# Altium PCB snowflake_r2.PcbDoc (part 2 of 2)
Units mm, origin at the board's own origin, x right, y up, seen from the top; angles counter-clockwise.
Board outline 80 x 69.28 mm, 2 copper layers (Component Side, Bottom Layer), stack 1.554 mm thick; 100 components, 57 nets, 399 pads, 234 vias.
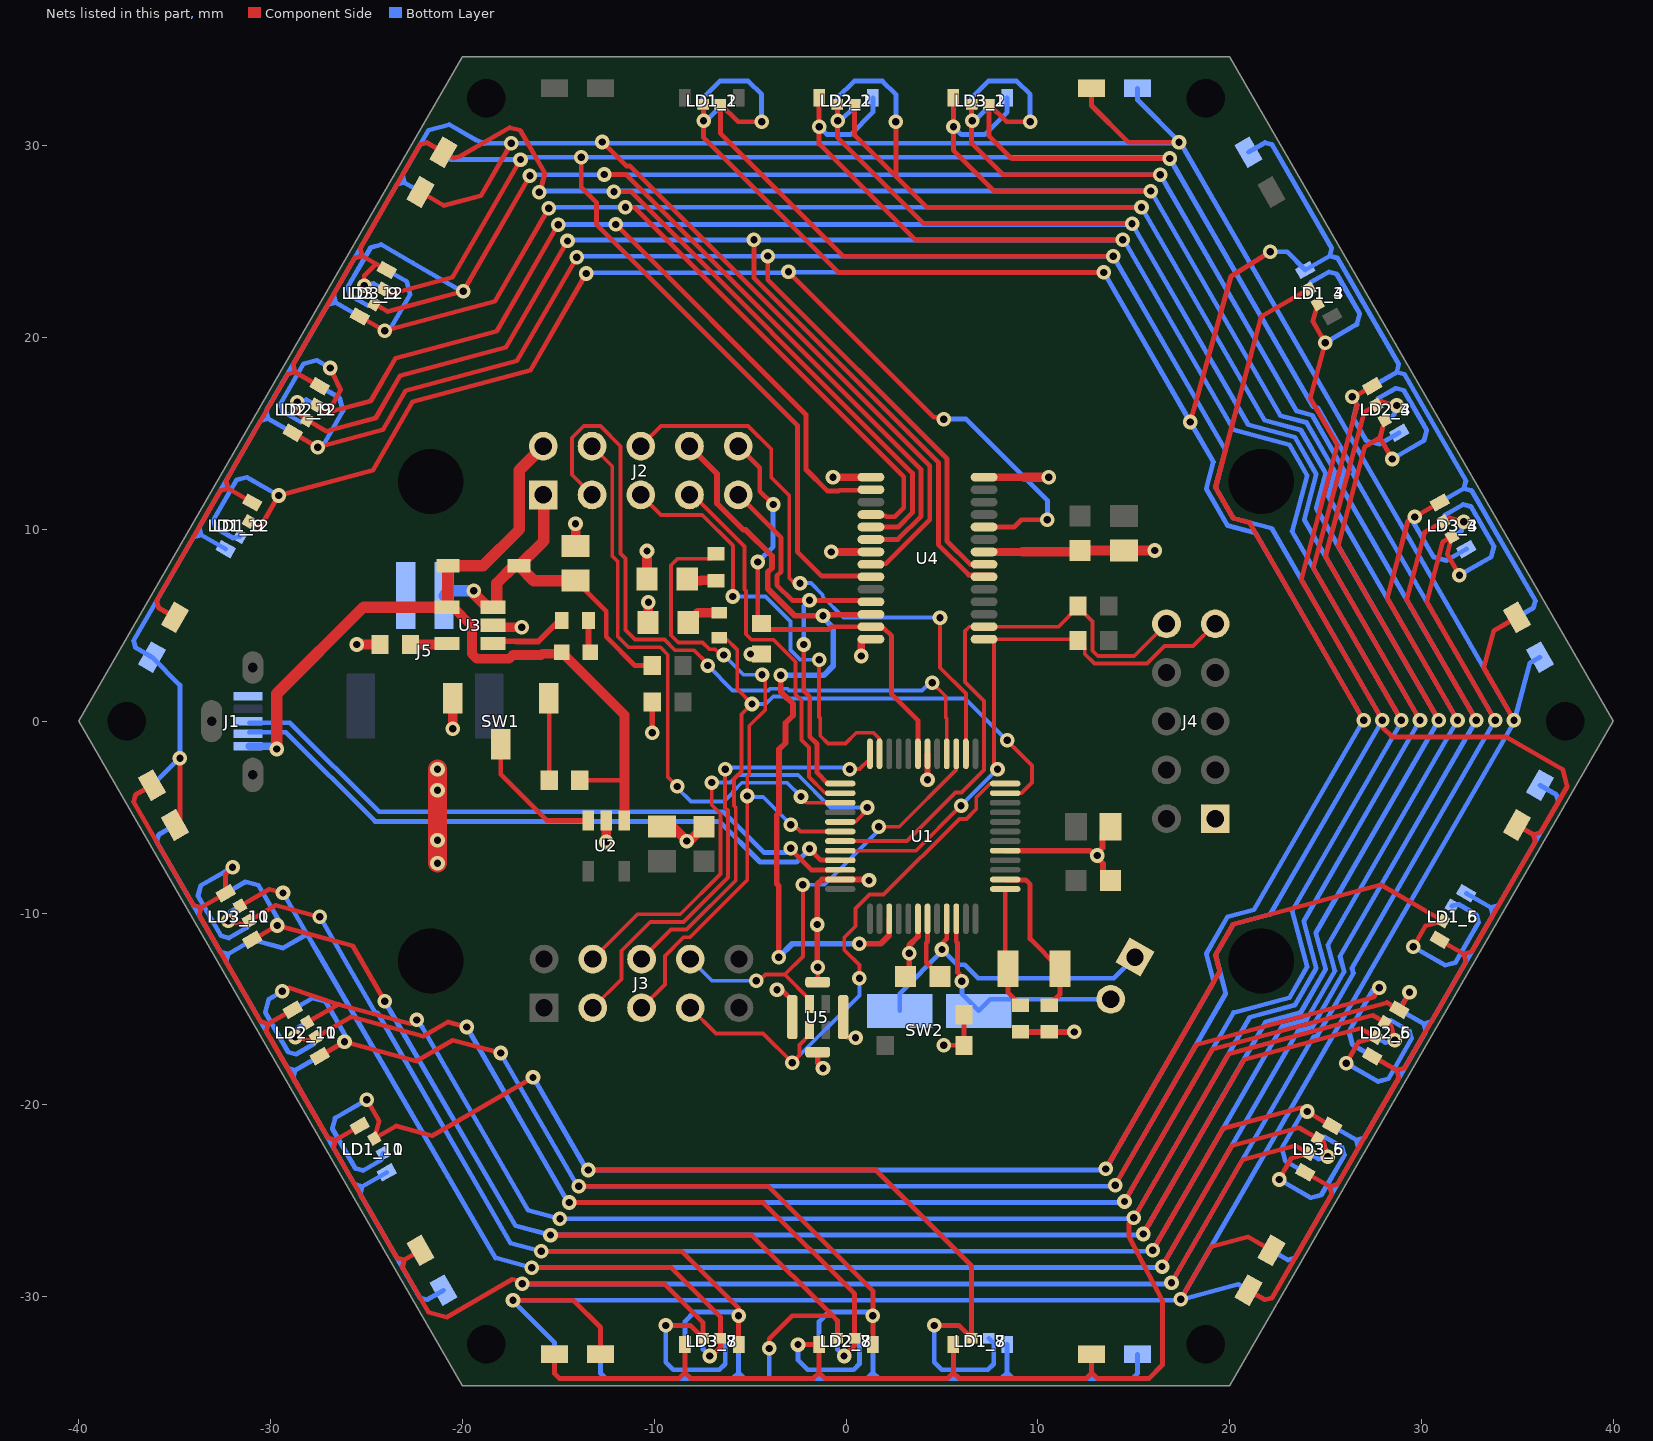
[diagram p2: the nets of this part, all layers, seen from the top]

## Via types
v1: diameter 0.762, hole 0.381, Component Side to Bottom Layer, tented both sides, 234 vias

## Nets (pads, with @x,y where several pads share a name; then routed paths per layer and width w, separated by ;. In a path a pad name is that pad's centre, name@x,y a point inside that pad or via, vN(x,y) a via of type N, cw(c..) or ccw(c..) an arc to the next point about the centre after c; other vN are vias at no path point) (continued)
CS3: LD1_1.3 LD1_2.3 LD1_3.3 LD1_4.1 LD1_5.2 LD1_6.2 LD1_7.2 LD1_8.2 LD1_9.2 LD1_10.2 LD1_11.2 LD1_12.2 LD2_4.1 LD3_4.1 LD4_4.2 LD5_4.2 U4.24 | length 358.3
  Component Side w0.25: LD1_9.2@-31.139,10.415 -30.715,10.17 -30.462,10.238 v1(-29.58,11.766) -24.661,13.084 -22.598,16.657 -16.448,18.305 v1(-13.54,23.342) ; v1(-24.98,-19.734) -24.342,-20.838 LD1_11.2@-24.589,-21.76 -23.456,-21.105 -21.578,-21.609 v1(-16.317,-18.571) ; v1(-13.445,-23.397) 1.544,-23.397 6.55,-28.403 LD1_7.2@6.55,-32.175 5.875,-31.5 v1(4.6,-31.5) ; v1@-7.475,31.175 v1@-7.425,31.225 ; LD1_1.3@-7.45,32.175 -7.425,32.175 v1@-7.425,31.274 ; v1@-7.425,31.275 v1(-7.425,31.302) ; v1(-3,23.425) 4.577,15.848 5.002,15.848 v1(5.1,15.75) ; U4.24@7.7,10.125 8.775,10.125 9.15,10.5 v1(10.5,10.5) ; v1(13.445,23.397) -0.397,23.397 -7.425,30.425 v1@-7.425,31.225 ; v1(13.54,-23.342) 19.491,-13.035 19.263,-12.186 20.185,-10.589 27.873,-8.529 LD1_5.2@31.139,-10.415 30.217,-10.662 v1(29.58,-11.766) ; v1(17.947,15.6) 20.075,23.2 v1(22.125,24.475) ; LD1_3.3@24.139,22.539 21.652,21.104 19.263,12.186 20.184,10.589 21.034,10.362 v1(26.985,0.054) ; v1@-7.425,31.225 v1@-7.425,31.274 ; v1@-7.425,31.225 -7.4,31.25 v1@-7.425,31.274
  Bottom Layer w0.25: LD1_12.2@-31.589,9.636 -31.931,9.544 -32.872,10.088 -32.982,10.497 -31.782,12.576 -31.236,12.722 v1(-29.58,11.766) ; v1(-24.98,-19.734) -26.636,-20.69 -26.782,-21.236 -25.582,-23.315 -25.172,-23.424 -24.231,-22.881 LD1_10.2@-24.139,-22.539 ; v1@-16.3,-18.562 v1@-13.54,-23.342 ; v1(-13.54,23.342) -13.498,23.384 -3.013,23.384 -2.986,23.411 13.431,23.411 v1(13.445,23.397) v1(17.947,15.6) 19.152,13.512 18.78,12.122 19.888,10.203 21.352,9.811 v1(26.985,0.054) 21.278,-9.83 19.888,-10.203 18.78,-12.122 19.172,-13.586 v1(13.54,-23.342) ; v1(-13.445,-23.397) v1@13.485,-23.397 ; v1(-7.425,31.302) -7.289,31.302 -6.575,32.015 -6.575,32.175 LD1_2.3@-6.55,32.175 ; v1(4.6,-31.5) 4.6,-33.412 5,-33.812 7.4,-33.812 7.7,-33.512 7.7,-32.425 LD1_8.2@7.45,-32.175 ; v1(5.1,15.75) 6.262,15.75 10.5,11.512 v1(10.5,10.5) ; LD4_4.2@20.979,29.664 21.845,30.164 22.203,30.068 25.322,24.665 25.212,24.256 ; v1(22.125,24.475) 22.995,24.475 LD1_4.1@23.946,23.525 25.212,24.256 ; LD2_4.1@27.446,17.462 28.712,18.193 ; v1(29.58,-11.766) 31.236,-12.722 31.782,-12.576 32.982,-10.497 32.872,-10.088 31.931,-9.544 LD1_6.2@31.589,-9.636 ; LD3_4.1@30.946,11.4 32.212,12.131 ; LD5_4.2@34.979,5.415 35.845,5.915 35.941,6.273 32.622,12.021 32.212,12.131 ; 25.212,24.256 25.622,24.146 28.822,18.603 28.712,18.193 ; 28.712,18.193 29.122,18.084 32.322,12.541 32.212,12.131
CS4: LD1_1.2 LD1_2.2 LD1_3.2 LD1_4.2 LD1_5.1 LD2_5.1 LD2_6.4 LD2_7.4 LD2_8.4 LD2_9.4 LD2_10.4 LD2_11.4 LD2_12.4 LD3_5.1 LD4_5.2 LD5_5.2 U4.21 | length 343.6
  Component Side w0.25: LD2_9.4@-28.846,15.038 v1(-27.547,14.288) -24.144,15.199 -22.972,17.229 -17.148,18.789 v1(-14.029,24.191) ; LD2_11.4@-27.446,-17.462 v1(-26.147,-16.712) -22.39,-17.719 -20.503,-16.629 v1(-18,-17.3) ; v1(-13.935,-24.245) -4.055,-24.245 1.4,-29.7 LD2_7.4@1.4,-32.5 ; v1(-4.4,31.25) -5.625,31.25 LD1_1.2@-6.55,32.175 -6.55,30.65 -0.145,24.245 v1(13.935,24.245) ; v1(-4.075,24.25) -4.075,23.021 5.266,13.681 5.266,9.384 6.475,8.175 U4.21@7.7,8.175 ; v1(14.029,-24.191) 18.256,-16.87 27.518,-14.388 v1(27.8,-13.9) ; LD5_5.2@20.979,-29.664 21.845,-30.164 22.203,-30.068 25.322,-24.665 25.212,-24.256 ; LD3_5.1@23.946,-23.525 25.212,-24.256 ; LD1_3.2@24.589,21.76 24.342,20.838 v1(24.98,19.734) 24.205,16.843 25.619,14.395 23.738,7.375 v1(27.965,0.054) 27.965,-0.313 28.467,-0.816 34.433,-0.816 34.459,-0.843 37.362,-2.518 37.573,-3.307 37.598,-3.402 36.222,-5.786 35.845,-5.915 ; LD2_5.1@27.446,-17.462 28.712,-18.193 ; LD1_5.1@30.946,-11.4 32.212,-12.131 ; LD4_5.2@34.979,-5.415 35.845,-5.915 ; 25.212,-24.256 25.622,-24.146 28.822,-18.603 28.712,-18.193 ; 28.712,-18.193 29.122,-18.084 32.322,-12.541 32.212,-12.131 ; 32.212,-12.131 32.622,-12.021 35.941,-6.273 35.845,-5.915
  Bottom Layer w0.25: LD2_10.4@-28.846,-15.038 -27.807,-14.438 -27.124,-14.621 -25.974,-16.612 v1(-26.147,-16.712) ; v1(-27.547,14.288) -27.374,14.188 -26.224,16.179 -26.407,16.862 LD2_12.4@-27.446,17.462 ; v1@-18.006,-17.303 v1@-14.029,-24.191 ; v1(-14.029,24.191) -13.975,24.245 v1(13.935,24.245) 19.781,14.12 19.263,12.186 20.184,10.589 22.193,10.051 v1(27.965,0.054) 22.119,-10.071 20.185,-10.589 19.263,-12.186 19.801,-14.194 v1(14.029,-24.191) ; v1(-13.935,-24.245) v1@13.975,-24.245 ; LD1_2.2@-7.45,32.175 -7.45,32.5 -6.575,33.375 -5.1,33.375 -4.4,32.675 v1(-4.4,31.25) ; LD2_8.4@-1.4,-32.5 -1.4,-31.3 -0.9,-30.8 1.4,-30.8 v1(1.4,-31) ; LD1_4.2@24.139,22.539 24.231,22.881 25.172,23.424 25.582,23.315 26.782,21.236 26.636,20.69 v1(24.98,19.734) ; LD2_6.4@27.446,-17.462 26.407,-16.862 26.224,-16.179 27.492,-13.983 v1(27.8,-13.9)
CS5: LD1_6.1 LD2_1.4 LD2_2.4 LD2_3.4 LD2_4.4 LD2_5.4 LD2_6.1 LD2_7.3 LD2_8.3 LD2_9.3 LD2_10.3 LD2_11.3 LD2_12.3 LD3_6.1 LD4_6.2 LD5_6.2 U4.20 | length 311.7
  Component Side w0.25: v1(-28.712,-16.462) -27.961,-16.663 LD2_11.3@-27.639,-16.477 -25.803,-15.417 -22.046,-16.424 -20.755,-15.678 v1(-19.772,-15.941) ; v1(-28.612,16.635) -28.6,16.1 LD2_9.3@-28.089,15.698 -27.088,15.12 -24.522,15.808 -23.249,18.011 -17.722,19.492 v1(-14.519,25.039) ; v1@-19.772,-16.028 -19.7,-16.1 v1@-19.75,-16.087 ; v1(-14.425,-25.094) -4.306,-25.094 0.45,-29.85 LD2_7.3@0.45,-32.175 0.45,-32.546 v1(-0.1,-33.096) ; v1(-4.8,25.1) -4.8,23.11 4.816,13.494 4.816,9.198 6.389,7.625 7.7,7.625 U4.20@7.7,7.525 ; LD2_1.4@-1.4,32.5 v1(-1.4,31) -1.4,30.1 3.606,25.094 v1(14.425,25.094) ; v1(14.519,-25.039) 19.097,-17.111 28.208,-14.669 LD2_5.4@28.846,-15.038 ; v1(26.4,16.909) v1@26.422,16.871 ; LD2_3.4@27.446,17.462 v1@26.422,16.871 ; LD2_5.4@28.867,-15.05 29.236,-14.412 v1(29.375,-14.125) ; v1(28.944,0.054) 24.367,7.983 26.645,16.485 v1@26.422,16.871
  Bottom Layer w0.25: v1(-28.712,-16.462) -28.716,-16.463 -28.715,-16.461 -28.587,-15.985 LD2_10.3@-28.089,-15.698 ; v1(-28.612,16.635) -28.615,16.637 -28.613,16.637 -28.137,16.765 LD2_12.3@-27.639,16.477 ; v1(-19.772,-15.941) v1@-14.519,-25.039 ; v1(-14.519,25.039) -14.465,25.094 v1(14.425,25.094) ; v1(-14.425,-25.094) v1@14.465,-25.094 ; v1(-1.4,31) -0.986,30.586 0.236,30.586 1.4,31.75 LD2_2.4@1.4,32.5 ; LD2_8.3@-0.45,-32.175 -0.45,-32.75 -0.1,-33.1 v1(-0.1,-33.096) ; v1@14.499,25.074 20.205,15.191 23.117,14.411 24.038,12.814 23.258,9.903 v1(28.944,0.054) 28.964,-0.02 23.258,-9.903 24.038,-12.814 23.117,-14.411 20.205,-15.191 v1(14.519,-25.039) ; LD5_6.2@22.179,-27.585 23.045,-28.085 23.403,-27.989 26.722,-22.241 26.612,-21.831 ; LD3_6.1@25.346,-21.1 26.612,-21.831 ; v1(26.4,16.909) 26.643,16.488 26.454,15.781 27.124,14.621 27.807,14.438 LD2_4.4@28.846,15.038 ; v1(29.375,-14.125) LD2_6.1@28.846,-15.038 30.112,-15.769 ; LD1_6.1@32.346,-8.975 33.612,-9.706 ; LD4_6.2@36.179,-3.336 37.045,-3.836 37.141,-4.194 34.022,-9.597 33.612,-9.706 ; 26.612,-21.831 27.022,-21.721 30.222,-16.178 30.112,-15.769 ; 30.112,-15.769 30.522,-15.659 33.722,-10.116 33.612,-9.706
CS6: LD1_7.1 LD2_1.3 LD2_2.3 LD2_3.3 LD2_4.3 LD2_5.3 LD2_6.3 LD2_7.1 LD2_8.2 LD2_9.2 LD2_10.2 LD2_11.2 LD2_12.2 LD3_7.1 LD4_7.2 LD5_7.2 U4.2 | length 313.1
  Component Side w0.25: v1(-29.396,-14.085) -29.034,-13.904 -26.429,-14.775 ; LD2_11.2@-28.125,-15.718 LD2_11.2@-28.089,-15.698 -26.472,-14.764 -26.429,-14.775 ; LD2_9.2@-27.639,16.477 -26.992,16.103 ; v1(-26.896,18.415) -26.35,17.25 -26.992,16.103 ; v1(-22.373,-15.573) -22.715,-15.77 -26.429,-14.775 ; LD5_7.2@-15.2,-33 -15.2,-34 -14.938,-34.262 -8.7,-34.262 -8.4,-33.962 ; v1(-15.009,25.887) -18.212,20.339 -23.488,18.926 -24.774,16.697 -26.992,16.103 ; v1(-12,25.9) -2.085,15.984 -2.085,13.123 -0.971,12.009 -0.379,12.009 -0.351,12.037 0.762,12.037 U4.2@0.8,12.075 ; LD3_7.1@-8.4,-32.5 -8.4,-33.962 ; v1(-2.5,-32.5) LD2_7.1@-1.4,-32.5 -1.4,-33.962 ; LD2_1.3@-0.45,32.175 -0.45,30.45 4.058,25.942 v1(14.915,25.942) ; LD1_7.1@5.6,-32.5 5.6,-33.962 ; LD4_7.2@12.8,-33 12.8,-34 12.538,-34.262 5.9,-34.262 5.6,-33.962 ; 12.838,-34 13.1,-34.262 15.8,-34.262 16.5,-33.562 16.5,-30.211 14.749,-26.858 14.749,-26.148 v1(15.009,-25.887) 19.937,-17.351 27.461,-15.335 LD2_5.3@28.089,-15.698 28.411,-15.884 v1(28.612,-16.635) ; v1(28.712,16.462) 27.961,16.663 LD2_3.3@27.639,16.477 27.012,16.115 24.995,8.59 v1(29.924,0.054) ; -8.4,-33.962 -8.1,-34.262 -1.7,-34.262 -1.4,-33.962 ; -1.4,-33.962 -1.1,-34.262 5.3,-34.262 5.6,-33.962
  Bottom Layer w0.25: v1(-29.396,-14.085) -30.099,-14.491 -30.282,-15.174 -29.082,-17.252 -28.672,-17.362 -27.731,-16.819 LD2_10.2@-27.639,-16.477 ; LD2_12.2@-28.089,15.698 -28.431,15.606 -29.372,16.15 -29.482,16.56 -28.282,18.638 -27.599,18.821 v1(-26.896,18.415) ; v1@-22.425,-15.603 -22.108,-15.92 -16.58,-25.496 v1(-14.915,-25.942) v1@14.955,-25.942 ; v1(-15.009,25.887) -14.955,25.942 -14.913,25.9 v1(-12,25.9) 14.873,25.9 v1(14.915,25.942) 20.971,15.451 23.413,14.797 24.521,12.878 23.887,10.51 v1(29.924,0.054) 23.867,-10.436 24.521,-12.878 23.413,-14.797 21.046,-15.431 v1(15.009,-25.887) ; v1(-2.5,-32.5) -2.5,-33.312 -2,-33.812 0.4,-33.812 0.7,-33.512 0.7,-32.425 LD2_8.2@0.45,-32.175 ; v1(-0.425,31.302) -0.289,31.302 0.425,32.015 0.425,32.175 LD2_2.3@0.45,32.175 ; LD2_6.3@27.639,-16.477 28.137,-16.765 28.613,-16.637 28.615,-16.637 v1(28.612,-16.635) ; LD2_4.3@28.089,15.698 28.587,15.985 28.715,16.461 28.715,16.463 v1(28.712,16.462)
CS7: LD1_8.1 LD2_1.2 LD2_2.2 LD2_3.2 LD2_4.2 LD2_5.2 LD2_6.2 LD2_7.2 LD2_8.1 LD3_8.1 LD3_9.4 LD3_10.4 LD3_11.4 LD3_12.4 LD4_8.2 LD5_8.2 U4.4 | length 334.3
  Component Side w0.25: LD3_11.4@-30.946,-11.4 v1(-29.647,-10.65) -25.719,-11.703 v1(-24.047,-14.6) v1@-24.038,-14.614 ; LD3_9.4@-25.346,21.1 v1(-24.047,20.35) -18.296,21.891 v1(-15.499,26.736) ; v1(-15.404,-26.79) -4.91,-26.79 -0.7,-31 ; v1(-11.5,26.8) -11.036,26.8 3.016,12.749 3.016,11.129 2.546,10.659 2.104,10.659 2.054,10.71 0.865,10.71 U4.4@0.8,10.775 ; v1(-4,-32.7) -4,-32.2 -2.8,-31 -0.7,-31 ; LD2_7.2@-0.45,-32.175 -0.45,-31.25 -0.7,-31 ; LD2_1.2@0.45,32.175 0.45,30.55 2.6,28.4 ; v1(2.6,31.25) 2.6,28.4 ; v1(15.404,26.79) 4.21,26.79 2.6,28.4 ; v1(15.499,-26.736) 20.746,-17.647 26.838,-16.015 LD2_5.2@27.639,-16.477 26.717,-16.724 v1(26.08,-17.828) ; LD2_3.2@28.089,15.698 27.842,14.776 ; v1(28.48,13.672) 27.842,14.776 ; v1(30.903,0.054) 25.656,9.143 27.041,14.313 27.842,14.776
  Bottom Layer w0.25: LD3_10.4@-32.346,-8.975 -31.307,-8.375 -30.624,-8.558 -29.474,-10.55 v1(-29.647,-10.65) ; v1(-24.047,-14.6) -23.71,-15.183 -17.228,-26.302 v1(-15.404,-26.79) v1@15.444,-26.79 ; v1(-24.047,20.35) -23.874,20.25 -22.724,22.242 -22.907,22.925 LD3_12.4@-23.946,23.525 ; v1(-15.499,26.736) -15.444,26.79 v1(15.404,26.79) 21.812,15.692 23.71,15.183 25.004,12.941 24.516,11.118 v1(30.903,0.054) 24.496,-11.044 25.004,-12.941 23.71,-15.183 21.886,-15.672 v1(15.499,-26.736) ; LD5_8.2@-12.8,-33 -12.8,-34 -12.538,-34.262 -5.9,-34.262 -5.6,-33.962 ; LD3_8.1@-5.6,-32.5 -5.6,-33.962 ; -4,-34.262 v1(-4,-32.7) ; LD2_2.2@-0.45,32.175 -0.45,32.5 0.425,33.375 1.9,33.375 2.6,32.675 v1(2.6,31.25) ; LD2_8.1@1.4,-32.5 1.4,-33.962 ; LD1_8.1@8.4,-32.5 8.4,-33.962 ; LD4_8.2@15.2,-33 15.2,-34 14.938,-34.262 8.7,-34.262 8.4,-33.962 ; v1(26.08,-17.828) 27.736,-18.784 28.282,-18.638 29.482,-16.56 29.372,-16.15 28.431,-15.606 LD2_6.2@28.089,-15.698 ; LD2_4.2@27.639,16.477 27.731,16.819 28.672,17.362 29.082,17.252 30.282,15.174 30.136,14.628 v1(28.48,13.672) ; -5.6,-33.962 -5.3,-34.262 1.1,-34.262 1.4,-33.962 ; 1.4,-33.962 1.7,-34.262 8.1,-34.262 8.4,-33.962
CS8: LD1_9.1 LD2_9.1 LD3_1.4 LD3_2.4 LD3_3.4 LD3_4.4 LD3_5.4 LD3_6.4 LD3_7.4 LD3_8.4 LD3_9.1 LD3_10.3 LD3_11.3 LD3_12.3 LD4_9.2 LD5_9.2 U4.5 | length 300.5
  Component Side w0.25: LD4_9.2@-34.979,5.415 -35.845,5.915 -35.941,6.273 -32.622,12.021 -32.212,12.131 ; v1(-32.212,-10.399) -31.461,-10.601 LD3_11.3@-31.139,-10.415 -29.723,-9.598 -27.589,-10.169 v1@-27.475,-10.2 ; LD1_9.1@-30.946,11.4 -32.212,12.131 ; LD2_9.1@-27.446,17.462 -28.712,18.193 ; v1(-25.112,22.697) -25.112,23.232 -24.5,23.845 ; LD3_9.1@-23.946,23.525 -25.212,24.256 ; v1(-15.988,27.584) -15.955,27.603 -15.696,28.571 -16.983,30.802 -17.528,30.948 -20.118,29.452 -20.456,29.362 LD5_9.2@-20.979,29.664 -21.845,30.164 -22.203,30.068 -25.322,24.665 -25.212,24.256 ; v1(-15.894,-27.638) -8.562,-27.638 -5.6,-30.6 LD3_7.4@-5.6,-32.5 ; v1(-12.1,27.6) -11.199,27.6 3.466,12.935 3.466,10.867 2.723,10.125 U4.5@0.8,10.125 ; LD3_1.4@5.6,32.5 v1(5.6,31) 5.6,29.775 7.737,27.638 v1(15.894,27.638) ; v1(15.988,-27.584) 19.655,-21.234 23.7,-20.15 v1(24.047,-20.35) 25.1,-21 LD3_5.4@25.346,-21.1 ; 29.3,10.45 28.216,6.405 v1(31.883,0.054) ; v1(29.647,10.65) LD3_3.4@30.946,11.4 ; -32.212,12.131 -32.322,12.541 -29.122,18.084 -28.712,18.193 ; -28.712,18.193 -28.822,18.603 -25.622,24.146 -25.212,24.256
  Bottom Layer w0.25: v1(-32.212,-10.399) -32.216,-10.401 -32.215,-10.399 -32.087,-9.923 LD3_10.3@-31.589,-9.636 ; v1@-27.555,-9.982 v1@-27.544,-10 ; v1(-27.428,-10.2) -25.88,-12.882 -24.554,-15.179 -24.41,-15.218 -17.486,-27.212 v1(-15.894,-27.638) v1@15.934,-27.638 ; v1(-25.112,22.697) -25.115,22.699 v1(-25.112,22.697) -24.637,22.827 LD3_12.3@-24.139,22.539 ; v1(-15.988,27.584) -15.934,27.638 v1(15.894,27.638) 22.653,15.933 24.006,15.57 25.487,13.005 25.144,11.726 v1(31.883,0.054) 25.124,-11.651 25.487,-13.005 24.006,-15.57 22.727,-15.913 v1(15.988,-27.584) ; LD3_8.4@-8.4,-32.5 -8.4,-31.3 -7.9,-30.8 -5.6,-30.8 v1(-5.6,-31) ; v1(5.6,31) 6.014,30.586 7.236,30.586 8.4,31.75 LD3_2.4@8.4,32.5 ; LD3_6.4@23.946,-23.525 22.907,-22.925 22.724,-22.242 23.874,-20.25 v1(24.047,-20.35) ; v1(29.647,10.65) 29.474,10.55 30.624,8.558 31.307,8.375 LD3_4.4@32.346,8.975
CS9: LD1_10.1 LD2_10.1 LD3_1.3 LD3_2.3 LD3_3.3 LD3_4.3 LD3_5.3 LD3_6.3 LD3_7.3 LD3_8.3 LD3_9.3 LD3_10.1 LD3_11.2 LD3_12.2 LD4_10.2 LD5_10.2 U4.6 | length 304.8
  Component Side w0.25: LD3_11.2@-31.589,-9.636 -30.072,-8.76 v1(-29.353,-8.952) ; LD3_9.3@-24.589,21.76 -23.896,21.36 v1(-19.951,22.417) v1(-16.478,28.432) ; v1(-16.384,-28.487) -9.113,-28.487 -6.55,-31.05 LD3_7.3@-6.55,-32.175 -6.55,-32.65 -7.1,-33.2 v1(-7.1,-33.096) ; v1(-12.6,28.5) -11.463,28.5 3.916,13.121 3.916,10.681 2.71,9.475 U4.6@1.3,9.475 U4.6@0.8,9.475 ; LD3_1.3@6.55,32.175 6.55,30.125 8.188,28.487 v1(16.384,28.487) ; v1(16.478,-28.432) 20.114,-22.136 23.615,-21.197 LD3_5.3@24.589,-21.76 24.911,-21.946 v1(25.112,-22.697) v1@25.1,-22.5 ; v1(32.212,10.399) 31.461,10.601 LD3_3.3@31.139,10.415 30.165,9.852 29.227,6.351 v1(32.862,0.054)
  Bottom Layer w0.25: LD5_10.2@-34.979,-5.415 -35.845,-5.915 -35.941,-6.273 -32.622,-12.021 -32.212,-12.131 ; LD3_10.1@-30.95,-11.4 LD3_10.1@-30.949,-11.402 ; LD3_10.1@-30.946,-11.4 LD3_10.1@-30.949,-11.402 ; v1(-29.353,-8.952) -28.1,-11.104 ; LD2_10.1@-27.446,-17.462 -28.712,-18.193 ; LD3_12.2@-24.589,21.76 -24.931,21.668 -25.872,22.212 -25.982,22.622 -24.782,24.7 -24.236,24.847 -22.58,23.891 v1@-19.97,22.384 ; LD1_10.1@-23.946,-23.525 -25.212,-24.256 ; LD4_10.2@-20.979,-29.664 -21.845,-30.164 -22.203,-30.068 -25.322,-24.665 -25.212,-24.256 ; v1(-16.478,28.432) -16.424,28.487 v1(16.384,28.487) 23.493,16.173 24.303,15.956 25.97,13.069 25.773,12.333 v1(32.862,0.054) 25.753,-12.259 25.97,-13.069 24.303,-15.956 23.568,-16.153 v1(16.478,-28.432) ; LD3_8.3@-7.45,-32.175 -7.45,-32.75 -7.1,-33.1 v1(-7.1,-33.096) ; v1(6.575,31.302) 6.711,31.302 7.425,32.015 7.425,32.175 LD3_2.3@7.45,32.175 ; v1@16.424,-28.487 v1(-16.384,-28.487) -18.27,-27.981 -27.542,-12.062 -28.1,-11.104 ; LD3_6.3@24.139,-22.539 24.637,-22.827 25.113,-22.699 25.115,-22.699 v1(25.112,-22.697) ; LD3_4.3@31.589,9.636 32.087,9.923 32.215,10.399 32.215,10.401 v1(32.212,10.399) ; -32.212,-12.131 LD3_10.1@-30.949,-11.402 ; -32.212,-12.131 -32.322,-12.541 -29.122,-18.084 -28.712,-18.193 ; LD3_10.1@-30.949,-11.402 -30.951,-11.398 -30.946,-11.399 -29.351,-11.826 -28.1,-11.104 ; -28.712,-18.193 -28.822,-18.603 -25.622,-24.146 -25.212,-24.256
CS10: LD1_11.1 LD2_11.1 LD3_1.2 LD3_2.2 LD3_3.2 LD3_4.2 LD3_5.2 LD3_6.2 LD3_7.2 LD3_8.2 LD3_9.2 LD3_10.2 LD3_11.1 LD4_11.2 LD5_11.2 LD5_12.1 U4.9 | length 311.6
  Component Side w0.25: LD5_11.2@-36.179,-3.336 -37.045,-3.836 -37.141,-4.194 -34.022,-9.597 -33.612,-9.706 ; v1(-31.98,-7.609) -32.346,-7.975 LD3_11.1@-32.346,-8.975 -33.612,-9.706 ; LD2_11.1@-28.846,-15.038 -30.112,-15.769 ; LD1_11.1@-25.346,-21.1 -26.612,-21.831 ; LD3_9.2@-24.139,22.539 -23.707,22.29 -20.51,23.146 v1(-16.968,29.281) ; -23.026,-28.118 -23.122,-28.476 -21.772,-30.814 -20.816,-31.07 -17.397,-29.096 -17.192,-29.151 v1(-16.874,-29.335) -9.465,-29.335 -7.45,-31.35 LD3_7.2@-7.45,-32.175 -8.125,-31.5 v1(-9.4,-31.5) ; LD4_11.2@-22.179,-27.585 -23.045,-28.085 -23.403,-27.989 -26.722,-22.241 -26.612,-21.831 ; v1(-13.8,29.4) -13.8,27.838 -13,27.038 -13,25.888 -2.535,15.423 -2.535,8.835 -1.263,7.563 0.762,7.563 U4.9@0.8,7.525 ; v1(9.6,31.25) 8.375,31.25 LD3_1.2@7.45,32.175 7.45,30.525 8.64,29.335 v1(16.874,29.335) ; v1(16.968,-29.281) 20.672,-22.864 23.425,-22.127 LD3_5.2@24.139,-22.539 ; v1(22.58,-23.891) 23.217,-22.786 LD3_5.2@24.139,-22.539 ; v1(31.98,7.609) 31.342,8.714 LD3_3.2@31.589,9.636 31.111,9.359 30.273,6.235 v1(33.842,0.054) ; -33.612,-9.706 -33.722,-10.116 -30.522,-15.659 -30.112,-15.769 ; -30.112,-15.769 -30.222,-16.178 -27.022,-21.721 -26.612,-21.831
  Bottom Layer w0.25: v1(-31.98,-7.609) -33.636,-8.565 -33.782,-9.112 -32.582,-11.19 -32.172,-11.3 -31.231,-10.757 LD3_10.2@-31.139,-10.415 ; LD5_12.1@-20.979,29.664 -20.596,29.281 v1(-16.968,29.281) -16.849,29.4 v1(-13.8,29.4) 16.809,29.4 v1(16.874,29.335) 24.334,16.414 24.599,16.343 26.489,13.07 26.437,12.879 v1(33.842,0.054) 26.382,-12.867 26.453,-13.132 24.564,-16.405 24.372,-16.456 v1(16.968,-29.281) ; v1(-16.874,-29.335) v1@16.914,-29.335 ; v1(-9.4,-31.5) -9.4,-33.412 -9,-33.812 -6.6,-33.812 -6.3,-33.512 -6.3,-32.425 LD3_8.2@-6.55,-32.175 ; LD3_2.2@6.55,32.175 6.55,32.5 7.425,33.375 8.9,33.375 9.6,32.675 v1(9.6,31.25) ; v1(22.58,-23.891) 24.236,-24.847 24.782,-24.7 25.982,-22.622 25.872,-22.212 24.931,-21.668 LD3_6.2@24.589,-21.76 ; LD3_4.2@31.139,10.415 31.231,10.757 32.172,11.3 32.582,11.19 33.782,9.112 33.636,8.565 v1(31.98,7.609)
CS11: LD1_12.1 LD2_12.1 LD3_12.1 LD4_12.2 LD5_1.1 LD5_2.1 LD5_3.1 LD5_4.1 LD5_5.1 LD5_6.1 LD5_7.1 LD5_8.1 LD5_9.1 LD5_10.1 LD5_11.1 LD5_12.2 U4.8 | length 273.1
  Component Side w0.25: LD5_11.1@-34.979,-5.415 -34.725,-5.161 v1(-34.725,-1.925) ; LD5_9.1@-22.179,27.585 -20.966,26.885 -19.031,27.404 v1(-17.458,30.129) ; v1(-17.364,-30.183) -14.217,-30.183 -12.8,-31.6 LD5_7.1@-12.8,-33 ; v1(-12.7,30.2) -12.527,30.2 -12.533,30.194 -12.533,30.033 -11.45,28.95 -11.277,28.95 4.366,13.308 4.366,10.495 2.084,8.213 0.838,8.213 U4.8@0.8,8.175 ; LD5_1.1@12.8,33 12.8,32.1 14.717,30.183 v1(17.364,30.183) ; v1(17.458,-30.129) 19.031,-27.404 20.966,-26.885 LD5_5.1@22.179,-27.585 ; v1(34.821,0.054) 33.248,2.78 33.766,4.715 LD5_3.1@34.979,5.415
  Bottom Layer w0.25: LD5_10.1@-36.179,-3.336 v1@-34.746,-1.904 ; v1@-34.725,-1.882 -34.725,1.883 LD4_12.2@-36.179,3.336 -37.045,3.836 -37.141,4.194 -34.022,9.597 -33.612,9.706 ; LD1_12.1@-32.346,8.975 -33.612,9.706 ; LD2_12.1@-28.846,15.038 -30.112,15.769 ; LD3_12.1@-25.346,21.1 -26.612,21.831 ; -23.026,28.118 -23.122,28.476 -21.772,30.814 -20.686,31.105 -19.275,30.29 ; LD5_12.2@-22.179,27.585 -23.045,28.085 -23.403,27.989 -26.722,22.241 -26.612,21.831 ; -19.294,30.298 -19.275,30.29 ; v1@-17.465,30.156 v1@-17.364,30.183 ; v1@-17.458,-30.129 -15.2,-32.387 LD5_8.1@-15.2,-33 ; v1(-17.458,30.129) -18.846,30.129 -18.85,30.125 -19.275,30.29 ; v1@-17.451,30.136 17.316,30.136 v1(17.364,30.183) ; v1(-17.364,-30.183) v1@17.364,-30.183 ; LD5_2.1@15.2,33 15.2,32.387 v1@17.458,30.129 ; v1@17.438,30.163 v1@17.458,30.129 ; LD5_6.1@20.979,-29.664 20.448,-29.357 17.465,-30.156 v1@17.418,-30.169 ; LD5_4.1@36.179,3.336 35.648,3.03 34.849,0.047 v1@34.836,0 ; -33.612,9.706 -33.722,10.116 -30.522,15.659 -30.112,15.769 ; -30.112,15.769 -30.222,16.178 -27.022,21.721 -26.612,21.831 ; v1@17.364,-30.183 v1@17.403,-30.183 ; v1@17.364,-30.183 v1@17.403,-30.183 ; v1@17.364,-30.183 v1@17.418,-30.169 ; v1@17.403,-30.183 v1@17.418,-30.169 ; v1@17.418,-30.169 v1(17.458,-30.129) v1@34.821,-0.054 ; v1@17.458,30.129 v1(34.821,0.054) v1@34.836,0 ; v1@34.821,-0.054 34.841,-0.02 v1@34.836,0 ; v1@34.821,-0.054 v1@34.836,0
D0: J2.3 U1.16 | length 37.9
  Component Side w0.2: J2.3@-13.24,11.8 -14.29,12.85 -14.29,14.775 -13.675,15.39 -12.805,15.39 -11.75,14.335 -11.75,8.736 -11.5,8.486 -11.5,4.756 -10.998,4.254 -9.464,4.254 -8.909,3.7 -7.926,3.7 -7.2,2.974 v1(-7.2,2.9) ; v1(4.5,2) 5.2,1.3 5.2,0.2 5.25,0.15 U1.16@5.25,-1.7
  Bottom Layer w0.2: v1(-7.2,2.9) -5.909,1.609 -4.045,1.609 -3.961,1.693 -3.058,1.693 -2.974,1.609 3.957,1.609 4.348,2 v1(4.5,2)
D1: J2.4 U1.27 | length 30.3
  Component Side w0.2: J2.4@-13.24,14.34 -12.19,13.29 -12.19,8.611 -11.9,8.32 -11.9,4.408 -11.347,3.854 -9.68,3.854 -9.294,3.468 -9.294,-2.906 v1(-8.8,-3.4) ; v1(-2.349,-3.928) -2.349,-3.951 -2.05,-4.25 U1.27@-0.3,-4.25
  Bottom Layer w0.2: v1(-8.8,-3.4) -8.8,-3.477 -8.086,-4.191 -6.367,-4.191 -5.89,-3.714 -5.89,-3.664 -5.436,-3.209 -3.068,-3.209 v1(-2.349,-3.928)
D2: J2.5 U1.23 | length 23.7
  Component Side w0.2: J2.5@-10.7,11.8 -9.644,10.744 -7.492,10.744 -5.9,9.152 v1(-5.9,6.5) ; v1(-1.4,3.2) -1.4,0.224 -1.339,0.163 -1.339,-0.757 -0.935,-1.162 -0.03,-1.162 0.532,-0.6 1.436,-0.6 1.731,-0.894 1.731,-1.681 U1.23@1.75,-1.7
  Bottom Layer w0.2: v1(-5.9,6.5) -4.2,6.5 -2.89,5.19 -2.89,3.714 -2.376,3.2 v1(-1.4,3.2)
D3: J2.6 U1.14 | length 31.4
  Component Side w0.2: J2.6@-10.7,14.34 -9.65,15.39 -5.1,15.39 -3.9,14.19 -3.9,12.7 -2.96,11.76 -2.96,7.46 -2.6,7.1 -2.5,7.2 v1(-2.4,7.2) ; v1(4.9,5.4) 4.9,2.787 6.25,1.437 U1.14@6.25,-1.7
  Bottom Layer w0.2: v1(-2.4,7.2) -1.823,7.2 -1.209,6.586 -1.209,6.486 -0.123,5.4 v1(4.9,5.4)
D4: J2.7 U1.26 | length 20
  Component Side w0.2: J2.7@-8.16,11.8 -7.983,11.8 -5.291,9.108 -5.291,6.867 -5.21,6.786 -5.21,4.535 -4.924,4.25 -3.776,4.25 -2.625,3.099 -2.625,1.401 -2.319,1.095 -2.319,-0.98 -1.935,-1.364 -1.935,-2.902 -1.105,-3.731 -0.319,-3.731 U1.26@-0.3,-3.75
D5: J3.3 U1.24 | length 24.6
  Component Side w0.2: J3.3@-13.2,-14.94 -11.71,-13.45 -11.71,-11.965 -10.208,-10.463 -8.473,-10.463 -6.15,-8.14 -6.15,-4.66 -6.3,-4.51 v1(-6.3,-2.5) ; v1(0.2,-2.5) 0.704,-2.5 1.25,-1.954 U1.24@1.25,-1.7
  Bottom Layer w0.2: v1(-6.3,-2.5) -6.3,-2.519 -6.21,-2.61 -6.01,-2.409 0.109,-2.409 v1(0.2,-2.5)
D6: J3.4 U1.29 | length 24.2
  Component Side w0.2: J3.4@-13.2,-12.4 -10.863,-10.063 -8.639,-10.063 -6.55,-7.974 -6.55,-4.826 -7,-4.376 v1(-7,-3.2) ; U1.29@-0.3,-5.25 -0.281,-5.231 0.506,-5.231 1.1,-4.636 v1(1.1,-4.5)
  Bottom Layer w0.2: v1(-7,-3.2) -6.023,-3.2 -5.633,-2.809 -2.492,-2.809 -0.801,-4.5 v1(1.1,-4.5)
D7: J3.5 R2.2 U1.30 | length 37.8
  Component Side w0.2: J3.5@-10.66,-14.94 -9.44,-13.719 -9.44,-12.235 -8.468,-11.263 -8.141,-11.263 -5.15,-8.271 v1(-5.15,-3.9) -5.15,-2.892 -5.04,-2.783 -5.04,-0.239 -4.21,0.591 -4.21,2.108 -4.375,2.273 v1(-4.375,2.425) ; R2.2@-6.777,8.72 -7.027,8.47 -8.783,8.47 -9.124,8.129 -9.124,4.48 -8.744,4.1 -7.474,4.1 -7.124,3.75 -6.827,3.75 -6.527,3.45 v1(-6.375,3.45) ; v1(-2.875,-5.4) -2.723,-5.4 -2.373,-5.75 U1.30@-0.3,-5.75
  Bottom Layer w0.2: v1(-6.375,3.45) -5.35,2.425 v1(-4.375,2.425) ; v1(-5.15,-3.9) -5.093,-3.958 -4.317,-3.958 v1(-2.875,-5.4)
D8: J3.6 R3.2 U1.11 | length 39.3
  Component Side w0.2: J3.6@-10.66,-12.4 -9.123,-10.863 -8.307,-10.863 -5.75,-8.306 -5.75,-4.494 -5.841,-4.404 -5.841,-3.017 -5.44,-2.617 -5.44,0.36 v1(-4.9,0.9) -5.666,1.666 -5.666,3.717 -6.299,4.35 R3.2@-6.6,4.35 ; U1.11@8.3,-3.75 9.15,-3.75 9.7,-3.2 9.7,-2.3 v1(8.4,-1)
  Bottom Layer w0.2: v1(-4.9,0.9) -4.188,0.9 -3.796,1.293 -3.223,1.293 -3.121,1.19 6.21,1.19 v1(8.4,-1)
EN: SW1.2 U2.3 | length 7.1
  Component Side w0.25: SW1.2@-18,-1.2 -18,-2.775 -15.6,-5.175 U2.3@-13.45,-5.175
GCLK: J2.8 U1.39 U4.12 | length 43.1
  Component Side w0.3: J2.8@-8.16,14.34 -6.72,12.9 -6.72,11.344 -5.351,9.976 -5.228,9.976 -3.86,8.607 -3.86,7.993 -4.075,7.778 -4.075,6.903 -2.672,5.5 v1(-1.2,5.5) -1.154,5.546 0.771,5.546 U4.12@0.8,5.575 ; v1(-3.5,-12.3) -3.5,-8.592 -3.616,-8.476 -3.616,-4.894 -3.49,-4.767 -3.49,-1.467 -3.159,-1.137 -3.159,-0.095 -2.769,0.296 -2.769,0.909 -3.4,1.54 v1(-3.4,2.4) ; v1(0.7,-11.6) 1.807,-11.6 2.25,-11.157 U1.39@2.25,-10.3
  Bottom Layer w0.3: v1(-3.5,-12.3) -2.8,-11.6 v1(0.7,-11.6) ; v1(-3.4,2.4) -1.153,2.4 -0.66,2.893 -0.66,4.865 -1.2,5.406 v1(-1.2,5.5)
GND: C1.1 C2.1 C3.1 C4.1 C5.1 C6.1 C7.1 C8.1 C9.1 C10.1 D2.1 D3.1 J1.5 J4.1 J5.2 R4.1 R7.1 R10.1 SW1.3 SW2.3 SW2.4 U1.5 U1.18 U1.35 U1.42 U2.2 U3.2 U4.1 U4.7 U4.14 U4.22 U4.28 U5.5 U5.6 U5.7 U5.8 | length 65.4
  Component Side w0.25: v1(-4.975,3.5) R10.1@-4.4,3.5 ; v1(-3.6,-14) -3.502,-14.098 -3.259,-14.098 -2.75,-14.607 U5.8@-2.75,-15.425 ; U5.7@-1.475,-13.65 U5.7@-1.475,-13.6 v1(-1.475,-12.825) ; U5.6@-0.2,-15.425 -0.2,-16.2 0.1,-16.5 v1(0.5,-16.5) ; v1(5.09,-16.89) 6.15,-16.89 SW2.3@6.15,-15.3 SW2.3@6.15,-15.29
  Component Side w0.3: v1(-10.1,-0.6) R7.1@-10.1,1 ; U5.5@-1.475,-17.2 U5.5@-1.475,-17.25 -1.475,-17.825 v1(-1.2,-18.1) ; v1(-1.475,-12.825) -1.5,-12.8 v1(-1.5,-10.6) -1.5,-8.5 -1.25,-8.25 U1.35@-0.3,-8.25 1.15,-8.25 v1(1.2,-8.3) ; C7.1@3.1,-13.3 3.3,-13.1 v1(3.3,-12.1) 3.3,-11.675 3.75,-11.225 U1.42@3.75,-10.3 ; v1(4.25,-3.05) U1.18@4.25,-1.7 ; U1.5@8.3,-6.75 12.725,-6.75 13.4,-7.425 13.4,-7.9 C6.1@13.8,-8.3 ; C1.1@9.1,-16.2 C2.1@10.6,-16.2 v1(11.9,-16.2) ; v1@13.113,-6.987 13.113,-6.862 13.375,-6.6 13.375,-5.925 C5.1@13.8,-5.5
  Component Side w0.4: v1(-0.775,8.825) U4.7@0.8,8.825 ; v1(-0.675,12.725) U4.1@0.8,12.725 ; v1(0.8,3.4) U4.14@0.8,4.275 ; U4.22@7.7,8.825 9.2,8.825 ; U4.28@7.7,12.725 9.3,12.725
  Component Side w0.5: v1(-25.5,4) R4.1@-24.3,4 ; v1(-20.5,-0.4) SW1.3@-20.5,1.2 ; U3.2@-18.4,5 -18.3,4.9 v1(-16.9,4.9) ; C8.1@-14.1,9.125 v1(-14.1,10.3) ; v1(-12.5,-6.3) U2.2@-12.5,-5.175 ; D2.1@-10.374,7.404 v1(-10.374,8.874) ; D3.1@-10.324,5.154 -10.312,5.166 -10.312,6.188 v1(-10.3,6.2) ; C3.1@-9.6,-5.5 -9.05,-5.5 v1(-8.3,-6.25) -8.15,-6.25 C4.1@-7.4,-5.5 ; 9.2,8.825 12.125,8.825 C10.1@12.2,8.9 C9.1@14.5,8.9 v1(16.1,8.9) ; 9.3,12.725 v1(10.575,12.725)
  Component Side w1: v1(-21.3,-7.4) v1(-21.3,-6.2) v1(-21.3,-3.6) v1(-21.3,-2.5)
  Bottom Layer w0.25: v1@-1.5,-12.8 v1(-1.475,-12.825) ; v1@5,-16.8 v1(5.09,-16.89)
  Bottom Layer w0.3: v1(-1.2,-18.1) v1@-1.1,-18.1
  Bottom Layer w0.5: v1@-10.4,8.9 v1(-10.374,8.874)
  other v1: 13.1,-7
I2S_SCK: J3.8 U1.15 U5.3 | length 24.1
  Component Side w0.2: v1(-4.671,-13.529) -4.519,-13.529 -4.2,-13.209 -3.191,-13.209 ; v1(-2.25,-8.525) -2.25,-12.269 -3.191,-13.209 ; U5.3@-1.9,-14.75 -1.9,-14.5 -3.191,-13.209 ; v1(1.7,-5.5) 2.777,-5.5 5.731,-2.546 5.731,-1.719 U1.15@5.75,-1.7
  Bottom Layer w0.2: J3.8@-8.12,-12.4 -6.991,-13.529 v1(-4.671,-13.529) ; v1(-2.25,-8.525) -1.125,-8.525 1.7,-5.7 v1(1.7,-5.5)
I2S_SD: J3.7 U1.12 U5.4 | length 29.5
  Component Side w0.2: J3.7@-8.12,-14.94 -6.785,-16.275 -4.325,-16.275 v1(-2.8,-17.8) -2.425,-17.425 -2.425,-16.875 -1.9,-16.35 U5.4@-1.9,-16.1 ; v1(0.7,-13.4) 0.7,-12.718 -0.09,-11.927 -0.09,-11.273 0.491,-10.692 0.491,-9.773 1.223,-9.04 1.96,-9.04 5.909,-5.09 6.286,-5.09 6.79,-4.586 6.79,-3.973 7.494,-3.269 8.281,-3.269 U1.12@8.3,-3.25
  Bottom Layer w0.2: v1(-2.8,-17.8) 0.7,-14.3 v1(0.7,-13.4)
LED_IRQ: J2.9 U1.25 U4.11 | length 21.3
  Component Side w0.25: J2.9@-5.62,11.8 -3.385,9.565 -3.385,7.797 -3.6,7.581 -3.6,7.1 -2.8,6.3 v1(-1.9,6.3) 0.725,6.3 U4.11@0.8,6.225 ; v1(-2.2,4) -2.2,1.578 -1.894,1.272 -1.894,-0.804 -1.51,-1.188 -1.51,-2.69 -0.95,-3.25 U1.25@-0.3,-3.25
  Bottom Layer w0.25: v1(-2.2,4) -2.2,6 v1(-1.9,6.3)
LED_RSTN: J2.10 R10.2 U1.19 U4.13 | length 24.3
  Component Side w0.25: J2.10@-5.62,14.34 -4.5,13.22 -4.5,12 v1(-3.8,11.3) ; v1(-4.6,8.3) -4.6,5.3 R10.2@-4.4,5.1 -4.085,4.785 -0.904,4.785 -0.763,4.925 U4.13@1.3,4.925 1.679,4.925 1.829,4.925 1.929,4.825 2.003,4.825 2.375,4.453 2.375,1.413 3.75,0.038 U1.19@3.75,-1.7
  Bottom Layer w0.25: v1(-4.6,8.3) -3.8,9.1 v1(-3.8,11.3)
NetC1_2: C1.2 U1.1 X1.1 | length 6.4
  Component Side w0.254: U1.1@8.3,-8.75 8.3,-12.75 X1.1@8.45,-12.9 8.45,-14.15 C1.2@9.1,-14.8
NetC2_2: C2.2 U1.2 X1.2 | length 8.6
  Component Side w0.254: U1.2@8.3,-8.25 8.3,-8.273 9.365,-8.273 9.6,-8.508 9.6,-11.35 X1.2@11.15,-12.9 11.15,-14.25 C2.2@10.6,-14.8
NetC7_2: C7.2 U1.43 | length 3.3
  Component Side w0.25: U1.43@4.25,-10.3 4.25,-11.497 4.184,-11.562 4.184,-12.584 C7.2@4.9,-13.3
NetD2_2: D2.2 R2.1 | length 1.5
  Component Side w0.5: D2.2@-8.274,7.404 -8.189,7.32 -7.569,7.32 -7.548,7.34 -6.798,7.34 R2.1@-6.777,7.32
NetD3_2: D3.2 R3.1 | length 1.8
  Component Side w0.5: D3.2@-8.224,5.154 -7.728,5.65 R3.1@-6.6,5.65
NetD4_2: D4.2 R5.2 | length 1.7
  Component Side w0.3: R5.2@-13.425,5.25 -13.425,3.7 D4.2@-13.325,3.6
NetR1_1: R1.1 SW1.1 | length 4.3
  Component Side w0.25: SW1.1@-15.5,1.2 -15.475,1.175 R1.1@-15.475,-3.075
NetR4_2: R4.2 U3.5 | length 1.9
  Component Side w0.5: R4.2@-22.7,4 -20.85,4 U3.5@-20.8,4.05
NetR5_1: R5.1 U3.1 | length 4.1
  Component Side w0.3: U3.1@-18.4,4.05 -18.275,4.175 -17.222,4.175 -17.207,4.16 -16.04,4.16 -14.925,5.275 R5.1@-14.775,5.275
SCL: J4.9 R8.1 U1.32 U4.15 | length 29.9
  Component Side w0.2: U1.32@-0.3,-6.75 3.65,-6.75 v1(6,-4.4) ; U4.15@7.7,4.275 7.71,4.265 7.71,-2.157 7.9,-2.348 v1(7.9,-2.5) ; U4.15@7.785,4.275 12.025,4.275 R8.1@12.1,4.2 12.45,3.85 12.45,3.51 12.96,3 15.685,3 16.601,3.916 18.086,3.916 J4.9@19.25,5.08
  Bottom Layer w0.2: v1(6,-4.4) v1(7.9,-2.5)
SDA: J4.10 R9.1 U1.31 U4.16 | length 30.4
  Component Side w0.2: U1.31@-0.3,-6.25 3.173,-6.25 5.714,-3.71 6.027,-3.71 7.2,-2.536 7.2,1.053 6.2,2.053 6.2,4.7 6.425,4.925 11.075,4.925 R9.1@12.1,5.95 ; R9.1@12.1,6 R9.1@12.1,5.95 ; J4.10@16.71,5.08 15.03,3.4 13.126,3.4 12.85,3.676 12.85,5.2 R9.1@12.1,5.95
SWCLK: J6.1 TP1.1 U1.45 | length 17
  Component Side w0.25: v1(5,-11.9) 5,-11.8 4.9,-11.7 5.25,-11.35 U1.45@5.25,-10.3
  Bottom Layer w0.25: TP1.1@2.8,-15.1 2.8,-14.2 v1@5.05,-11.95 ; v1(5,-11.9) v1@5.05,-11.95 ; J6.1@15.07,-12.3 13.97,-13.4 6.888,-13.4 6.182,-12.694 5.794,-12.694 v1@5.05,-11.95
SWDIO: J6.2 TP2.1 U1.46 | length 12.4
  Component Side w0.25: U1.46@5.75,-10.3 5.75,-11.497 5.816,-11.562 5.816,-13.096 6.04,-13.321 v1(6.04,-13.564)
  Bottom Layer w0.25: v1(6.04,-13.564) 6.04,-14.216 TP2.1@6.925,-15.1 7.525,-14.5 J6.2@13.8,-14.5
USB_D_N: J1.2 U1.33 | length 34.3
  Component Side w0.25: v1(-1.9,-6.65) -1.31,-7.24 -0.31,-7.24 U1.33@-0.3,-7.25
  Bottom Layer w0: J1.2@-31.175,-0.65 J1.2@-31.1,-0.575
  Bottom Layer w0.25: J1.2@-31.1,-0.575 -29.2,-0.575 -24.55,-5.225 -13.525,-5.225 -6.6,-5.225 -4.484,-7.341 -2.579,-7.341 -1.9,-6.662 v1(-1.9,-6.65)
USB_D_P: J1.3 U1.34 | length 34.3
  Component Side w0.25: v1(-2.875,-6.625) -2.875,-6.687 -1.812,-7.75 U1.34@-0.3,-7.75
  Bottom Layer w0: J1.3@-31.175,0 J1.3@-31.1,-0.075
  Bottom Layer w0.25: J1.3@-31.1,-0.075 -28.993,-0.075 -24.343,-4.725 -13.525,-4.725 -6.393,-4.725 -4.277,-6.841 -3.091,-6.841 v1(-2.875,-6.625)
VBAT: C8.2 D1.1 J2.1 J5.1 R6.2 U3.3 | length 20.2
  Component Side w0.25: C8.2@-14.1,7.325 -12.5,5.725 -12.5,4.4 -11,2.9 R6.2@-10.1,2.9
  Component Side w0.6: v1(-19.4,6.8) -19.369,6.769 -19.369,6.619 -18.7,5.95 U3.3@-18.4,5.95 ; U3.3@-18.375,5.925 U3.3@-18.4,5.95 ; J2.1@-15.78,11.8 -15.78,11.72 -15.75,11.69 -15.75,9.4 D1.1@-17.05,8.1 ; C8.2@-14.1,7.325 -16.275,7.325 D1.1@-17.05,8.1 ; U3.3@-18.4,5.95 -18.25,5.95 -18.2,6 -18.2,7.2 -17.3,8.1 D1.1@-17.05,8.1
  Bottom Layer w0.6: J5.1@-20.95,6.55 -20.7,6.8 v1(-19.4,6.8)
VBUS: D1.2 D4.1 J1.1 J2.2 R1.2 U2.1 U3.4 | length 47.2
  Component Side w0.25: R1.2@-13.875,-3.075 -11.675,-3.075 -11.55,-3.2
  Component Side w0.5: U3.4@-20.8,5.95 -20.5,5.95 -19.5,4.95 -19.5,4.586 -19.5,3.514 -19.236,3.25 -17.564,3.25 -17.364,3.45 -15.902,3.45 -15.838,3.514 -14.739,3.514 -11.55,0.325 -11.55,-3.2 U2.1@-11.55,-5.175
  Component Side w0.6: v1(-29.675,-1.45) -29.675,1.425 -25.15,5.95 U3.4@-20.8,5.95 -20.775,5.975 -20.775,8.075 D1.2@-20.75,8.1 -18.925,8.1 -17.025,10 -17.025,10.838 -17.03,10.843 -17.03,13.09 J2.2@-15.78,14.34
  Bottom Layer w0.4: J1.1@-31.1,-1.3 -29.923,-1.3 -29.773,-1.45 v1(-29.675,-1.45)
pads on no net: J1.4 J1.6 J1.7 J1.8 J5.MP1 J5.MP2 U1.13 U1.20 U1.37 U1.38 U1.41 U1.48 U2.4 U4.17

## Polygon pours and split planes (outlines as drawn)
GND on Bottom Layer "GND" (solid, remove dead copper, pour order 0): -40,0 -26.654,-23.116 -20,-34.641 20,-34.641 40,0 20,34.641 -20,34.641

## Silkscreen, mask and mechanical layers (free items; w line width, h text height)
Top Overlay:
  drawing of 32 lines, arcs and shapes, not listed
  text "VBUS" at -15.4,16.1 h1 r90
  text "ON" at -12.2,-1 h1 r90
  text "OFF" at -22.9,-1.4 h1 r90
  text "GND" at 22.2,-6.537 h1 r90
  text "3V3" at -17.2,-10.5 h1
  text "1" at 16.5,-10.9 h1 r60
  text "MIC" at -2.8,-12.3 h1
  text "SWC" at 17.1,-14.6 h1 r60
  text "SWD" at 15.5,-17.4 h1 r60
  text "RESET" at 2.2,-20.7 h1
Bottom Overlay:
  lines w0.102: -17.5,-27.5 -17.5,-31.5 -13.75,-31.5 ; -17.5,27.75 -17.5,31.5 -13.75,31.5 ; 13.75,-31.5 17.5,-31.5 17.5,-27.75 ; 17.5,27.75 17.5,31.5 17,31.5 ; 17,31.5 13.75,31.5 17,31.5
  text "LED_RSTN" at -5.1,24 h1 r90
  text "GCLK" at -7.7,20 h1 r90
  text "VBUS" at -15.3,19.6 h1 r90
  text "ledflake_r2   1/2018 / Project \"Special Snowflake\"" at 2.025,18.4 h1 r90
  text "D3" at -10.2,18.2 h1 r90
  text "D1" at -12.8,18.1 h1 r90
  text "Derived: Adafruit Feather M0 / PCB: M. Whitson / Mech: M. G. Belton" at 7.5,15.5 h0.8 r90
  text "VBAT" at -15.2,10.2 h1 r90
  text "LED_IRQ" at -4.9,10 h1 r90
  text "D0" at -12.7,9.9 h1 r90
  text "D2" at -10.2,9.9 h1 r90
  text "D4" at -7.7,9.9 h1 r90
  text "VBAT" at -22.5,9.3 h1
  text "GND" at -17.9,9.3 h1
  text "IIC_SDA" at 14.7,4.7 h1
  text "IIC_SCL" at 27.3,4.7 h1
  text "BATT" at -16.1,4.6 h1 r90
  text "USB" at -28,2.6 h1 r90
  text "A5" at 14.7,2.1 h1
  text "A4" at 22.6,2.1 h1
  text "A3" at 14.6,-0.4 h1
  text "A2" at 22.6,-0.4 h1
  text "A1" at 14.6,-2.9 h1
  text "A0" at 22.6,-2.9 h1
  text "I2S_SCK" at -7.7,-3.9 h1 r90
  text "GND" at 23.8,-5.462 h1
  text "AREF" at 14.65,-5.5 h1
  text "AUX1" at -5.1,-6.9 h1 r90
  text "3V3" at -15.2,-7.6 h1 r90
  text "D6" at -12.7,-8.7 h1 r90
  text "D8" at -10.2,-8.7 h1 r90
  text "SWCLK" at 13.253,-11.743 h1 r330
  text "SWDIO" at 12.015,-13.783 h1 r330
  text "AUX0" at -5,-16.7 h1 r90
  text "D5" at -12.7,-16.8 h1 r90
  text "/RST" at -15.391,-16.846 h1 r90
  text "D7" at -10.1,-16.9 h1 r90
  text "I2S_SD" at -7.7,-16.9 h1 r90
  text "SWCLK" at 4.3,-17.6 h1
  text "SWDIO" at 9.8,-17.7 h1
Mechanical 1:
  circle w0.254: c21.651,12.5 r3
  circle w0.254: c21.651,-12.5 r3
  circle w0.254: c-21.651,12.5 r3
  circle w0.254: c-21.651,-12.5 r3
Mechanical 2:
  the board outline again, w0.5
Mechanical 3:
  the board outline again, w0.102

## Dimensions
-40,0 to 40,0 on Mechanical 3
-20,-34.641 to -20,34.641 on Mechanical 3

## Text inside footprints (layer, text, board x,y; h text height)
J2: Top Overlay "10" at -3.7,13.9 h1; Top Overlay "9" at -3.7,11.3 h1; Top Overlay "1" at -18.1,11.3 h1; Top Overlay "2" at -18.32,13.832 h1
J3: Top Overlay "10" at -5.6,-10.6 h1; Top Overlay "9" at -5.6,-17.8 h1; Top Overlay "1" at -18.2,-15.4 h1; Top Overlay "2" at -18.28,-12.908 h1
J4: Top Overlay "10" at 17.3,6.9 h1 r90; Top Overlay "9" at 19.7,7.1 h1 r90; Top Overlay "1" at 19.805,-7.4 h1 r90; Top Overlay "2" at 17.218,-7.62 h1 r90